# EAGLE board Bad USB PCB (EAGLE 9.7.0)
REV: D
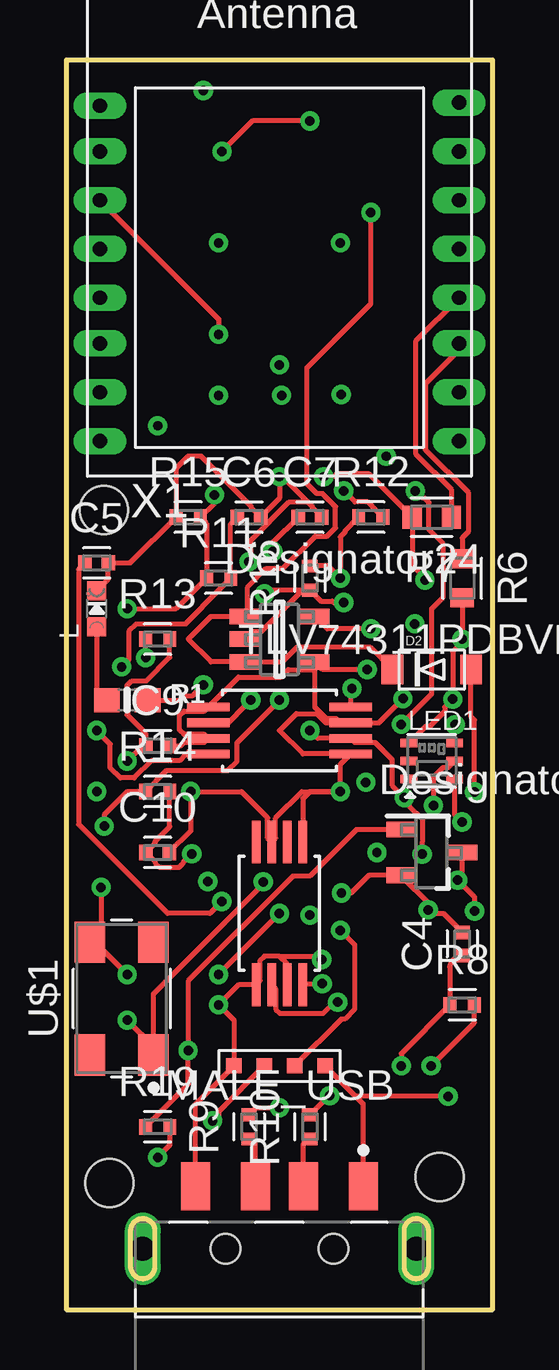
[diagram p0: board, top side]
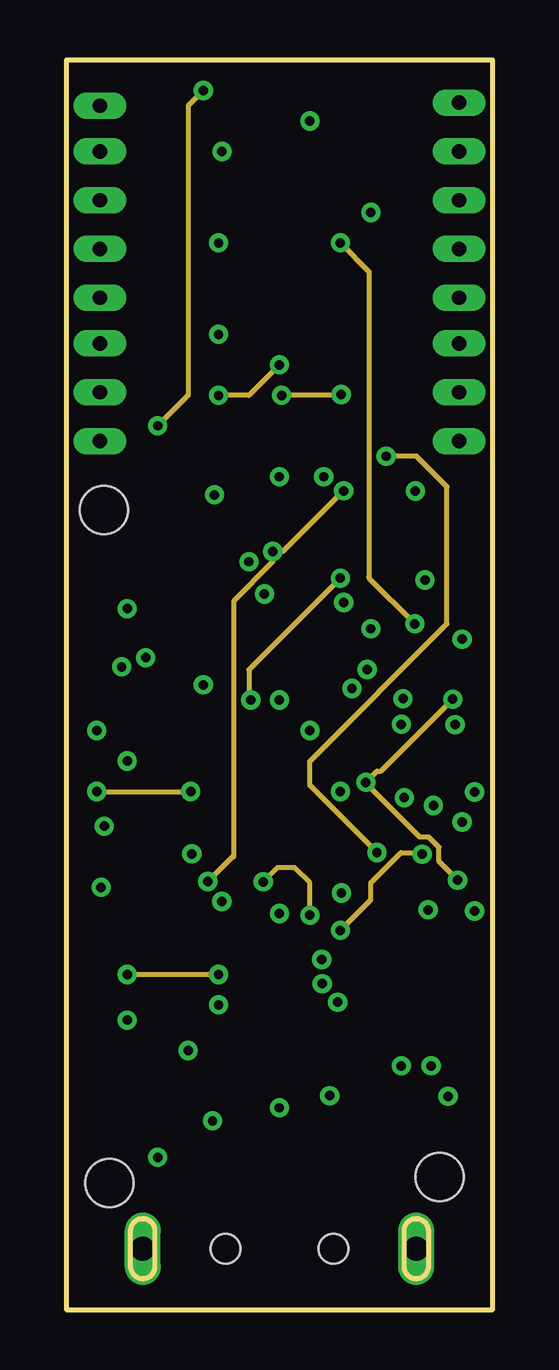
[diagram p1: board, inner layer Route6]
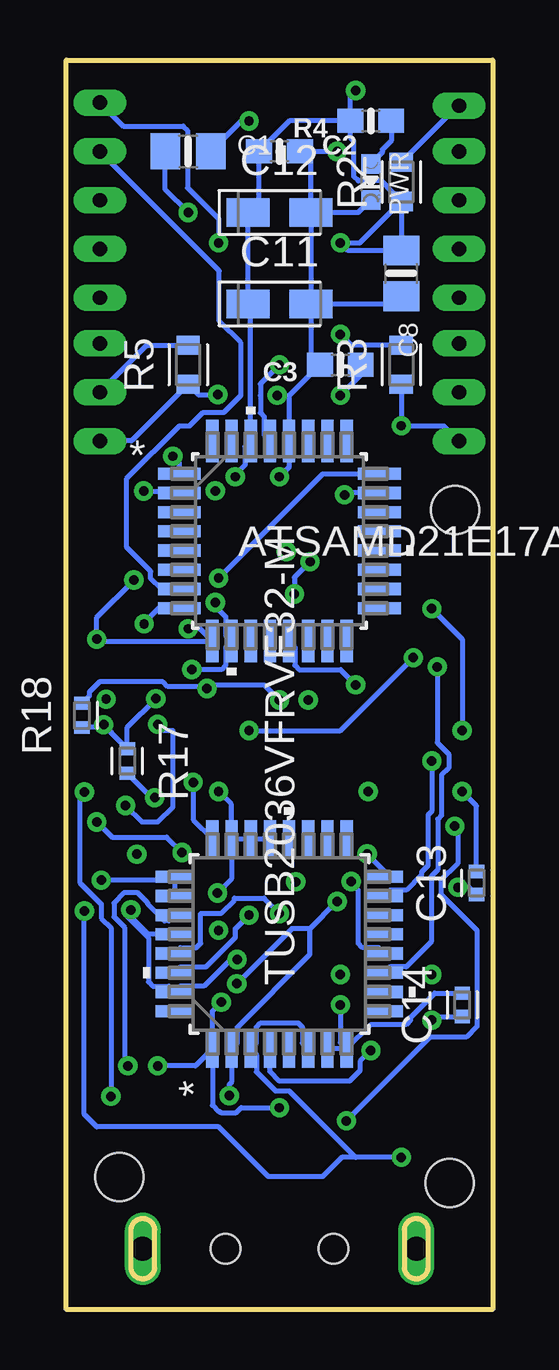
[diagram p2: board, bottom side, seen from below]

Size 17.78 x 52.07 mm. Coordinates in mm from the lower left corner, seen from the top.
Outline: 14.1,3.39 14.11,3.44 14.12,3.48 14.14,3.52 14.16,3.56 14.19,3.59 14.21,3.63 14.25,3.66 14.28,3.69 14.32,3.71 14.35,3.73 14.39,3.75 14.43,3.77 14.48,3.78 14.52,3.79 14.56,3.79 14.61,3.79 14.65,3.79 14.69,3.78 14.74,3.77 14.78,3.76 14.82,3.74 14.86,3.72 14.89,3.69 14.93,3.67 14.96,3.63 14.99,3.6 15.01,3.56 15.03,3.53 15.05,3.49 15.07,3.45 15.08,3.41 15.09,3.36 15.09,3.35 15.09,1.73 15.08,1.69 15.07,1.64 15.06,1.6 15.04,1.56 15.02,1.52 14.99,1.49 14.96,1.45 14.93,1.42 14.9,1.39 14.87,1.37 14.83,1.35 14.79,1.33 14.75,1.31 14.71,1.3 14.66,1.29 14.62,1.29 14.57,1.29 14.53,1.29 14.49,1.3 14.44,1.31 14.4,1.32 14.36,1.34 14.32,1.36 14.29,1.39 14.25,1.42 14.22,1.45 14.19,1.48 14.17,1.52 14.15,1.55 14.13,1.59 14.11,1.63 14.1,1.67 14.09,1.72 14.09,1.73 14.09,3.35 14.1,3.39
Outline: 2.7,3.39 2.71,3.44 2.72,3.48 2.74,3.52 2.76,3.56 2.79,3.59 2.82,3.63 2.85,3.66 2.88,3.69 2.91,3.71 2.95,3.73 2.99,3.75 3.03,3.77 3.08,3.78 3.12,3.79 3.16,3.79 3.21,3.79 3.25,3.79 3.29,3.78 3.34,3.77 3.38,3.76 3.42,3.74 3.46,3.72 3.49,3.69 3.53,3.67 3.56,3.63 3.59,3.6 3.61,3.56 3.63,3.53 3.65,3.49 3.67,3.45 3.68,3.41 3.69,3.36 3.69,3.35 3.69,1.73 3.68,1.69 3.67,1.64 3.66,1.6 3.64,1.56 3.62,1.52 3.59,1.49 3.57,1.45 3.53,1.42 3.5,1.39 3.46,1.37 3.43,1.35 3.39,1.33 3.35,1.31 3.31,1.3 3.26,1.29 3.22,1.29 3.17,1.29 3.13,1.29 3.09,1.3 3.04,1.31 3,1.32 2.96,1.34 2.92,1.36 2.89,1.39 2.85,1.42 2.82,1.45 2.79,1.48 2.77,1.52 2.75,1.55 2.73,1.59 2.71,1.63 2.7,1.67 2.69,1.72 2.69,1.73 2.69,3.35 2.7,3.39
Outline: 0,52.07 0,0 17.78,0 17.78,52.07 0,52.07
Copper layers (1*16): Top 0.035mm / dielectric 1.5mm / Bottom 0.035mm
Design rules "adafruit *": minimum track width 8mil, minimum drill 15.5mil, track to track 8mil, track to pad 8mil, pad to pad 8mil, via to via 8mil, smd to smd 8mil, copper to edge 10mil, drill to drill 8mil, minimum pad ring 10mil, minimum via ring 8mil, stop-mask expansion 2mil, vias tented up to drill 20mil, thermal gap 10mil
Net classes: 1 power: width 0.305 mm
Holes 2 mm at 15.56,5.53 1.8,5.28 1.56,33.32

## Footprints (pad centres in the part's own frame; a part is rotated, then mirrored left to right if it is on the bottom)
0805-NO = smd 1.24 x 1.5: 1 -0.95,0; 2 0.95,0
0603-NO = smd 1.075 x 1: 1 -0.85,0; 2 0.85,0
CAPC1005X60 = smd 0.56 x 0.629: 1 -0.485,0; 2 0.485,0
CAPMP3216X180N = smd 1.796 x 1.189: 1 -1.31,0; 2 1.31,0
SOD-123FL = smd 0.91 x 1.22: A 1.637,0; C -1.637,0
CHIPLED_0603_NOOUTLINE = smd 0.8 x 0.8: A 0,-0.75; C 0,0.75
APA102_2020 = smd 0.7 x 0.35: 1 -0.95,-0.75; 2 -0.95,0; 3 -0.95,0.75; 4 0.95,0.75; 5 0.95,0; 6 0.95,-0.75
0480371000 = smd 1.2 x 2: 1 3.5,2.6; 2 1,2.6; 3 -1,2.6; 4 -3.5,2.6 | drill 1 long: SH1 -5.7,0; SH2 5.7,0 | hole 1.25: -2.25,0; 2.25,0
RESC1608X60 = smd 0.799 x 0.974: 1 -0.815,0; 2 0.815,0
RESC1005X40 = smd 0.535 x 0.644: 1 -0.507,0; 2 0.507,0
DBV0005A_M = smd 1.2 x 0.65: 1 -1.475,0.95; 2 -1.475,0; 3 -1.475,-0.95; 4 1.475,-0.95; 5 1.475,0.95
VF32-M = smd 1.562 x 0.508: 1 -4.375,2.8; 2 -4.375,2; 3 -4.375,1.2; 4 -4.375,0.4; 5 -4.375,-0.4; 6 -4.375,-1.2; 7 -4.375,-2; 8 -4.375,-2.8; 17 4.375,-2.8; 18 4.375,-2; 19 4.375,-1.2; 20 4.375,-0.4; 21 4.375,0.4; 22 4.375,1.2; 23 4.375,2; 24 4.375,2.8 | smd 0.508 x 1.562: 9 -2.8,-4.375; 10 -2,-4.375; 11 -1.2,-4.375; 12 -0.4,-4.375; 13 0.4,-4.375; 14 1.2,-4.375; 15 2,-4.375; 16 2.8,-4.375; 25 2.8,4.375; 26 2,4.375; 27 1.2,4.375; 28 0.4,4.375; 29 -0.4,4.375; 30 -1.2,4.375; 31 -2,4.375; 32 -2.8,4.375
PW8-M = smd 1.778 x 0.356: 1 -2.972,0.975; 2 -2.972,0.325; 3 -2.972,-0.325; 4 -2.972,-0.975; 5 2.972,-0.975; 6 2.972,-0.325; 7 2.972,0.325; 8 2.972,0.975
DBZ0003A_M = smd 1.2 x 0.65: 1 -1.3,0.95; 2 -1.3,-0.95; 3 1.3,0
TQFP32_MC_MCH-M = smd 1.778 x 0.508: 1 -4.17,2.8; 2 -4.17,2; 3 -4.17,1.2; 4 -4.17,0.4; 5 -4.17,-0.4; 6 -4.17,-1.2; 7 -4.17,-2; 8 -4.17,-2.8; 17 4.17,-2.8; 18 4.17,-2; 19 4.17,-1.2; 20 4.17,-0.4; 21 4.17,0.4; 22 4.17,1.2; 23 4.17,2; 24 4.17,2.8 | smd 0.508 x 1.778: 9 -2.8,-4.17; 10 -2,-4.17; 11 -1.2,-4.17; 12 -0.4,-4.17; 13 0.4,-4.17; 14 1.2,-4.17; 15 2,-4.17; 16 2.8,-4.17; 25 2.8,4.17; 26 2,4.17; 27 1.2,4.17; 28 0.4,4.17; 29 -0.4,4.17; 30 -1.2,4.17; 31 -2,4.17; 32 -2.8,4.17
H10S-6.000-20-3050-TR__PACKAGE = smd 1.724 x 1.274: 1 -2.346,-1.321; 2 2.346,-1.321; 3 2.346,1.321; 4 -2.346,1.321
USBFLASHBREAKOUT = smd 0.635 x 0.635: 1 -1.905,0; 2 -0.635,0; 3 0.635,0; 4 1.905,0
ESP-12THROUGH-HOLE = drill 0.6 long: 1 -7.493,4.445; 2 -7.493,2.54; 3 -7.493,0.508; 4 -7.493,-1.524; 5 -7.493,-3.556; 6 -7.493,-5.461; 7 -7.493,-7.493; 8 -7.493,-9.525; 9 7.493,4.572; 10 7.493,2.54; 11 7.493,0.508; 12 7.493,-1.524; 13 7.493,-3.556; 14 7.493,-5.461; 15 7.493,-7.493; 16 7.493,-9.525

## Placement (x,y rotation side)
C1  10uF  [0805-NO]  12.7,48.26 0 bottom
C2  1uF  [0603-NO]  8.89,48.26 0 bottom
C3  1uF  [0603-NO]  6.35,39.37 180 bottom
C4  22 pF  [CAPC1005X60]  16.51,15.24 90 top
C5  22 pF  [CAPC1005X60]  1.27,31.11 0 top
C6  22 pF  [CAPC1005X60]  7.62,33.02 0 top
C7  22 pF  [CAPC1005X60]  10.16,33.02 0 top
C8  10uF  [0805-NO]  3.81,43.18 270 bottom
C9  22 pF  [CAPC1005X60]  3.81,23.5 0 top
C10  22 pF  [CAPC1005X60]  3.81,19.05 0 top
C11  [CAPMP3216X180N]  8.89,41.91 0 bottom
C12  [CAPMP3216X180N]  8.89,45.72 0 bottom
C13  [CAPC1005X60]  0.67,17.78 90 bottom
C14  [CAPC1005X60]  1.27,12.7 90 bottom
D2  SCHOTTKY  [SOD-123FL]  15.24,26.67 0 top
L  red  [CHIPLED_0603_NOOUTLINE]  1.27,29.21 0 top
LED1  AP102-2020  [APA102_2020]  15.24,22.86 0 top
MALE_USB  0480371000  [0480371000]  8.89,2.54 0 top
PWR  green  [CHIPLED_0603_NOOUTLINE]  5.08,46.99 180 bottom
R1  1.5K  [0603-NO]  2.54,25.4 0 top
R2  [RESC1608X60]  3.81,46.99 90 bottom
R3  [RESC1608X60]  3.81,39.37 90 bottom
R4  10K  [0603-NO]  5.08,49.53 180 bottom
R5  [RESC1608X60]  12.7,39.37 90 bottom
R6  [RESC1608X60]  16.51,30.48 270 top
R7  [RESC1608X60]  15.24,33.02 180 top
R8  1.5 kOhm  [RESC1005X40]  16.51,12.7 0 top
R9  27 ohm  [RESC1005X40]  7.62,7.62 90 top
R10  27 ohm  [RESC1005X40]  10.16,7.62 90 top
R11  27 ohm  [RESC1005X40]  6.35,30.48 0 top
R12  27 ohm  [RESC1005X40]  12.7,33.02 0 top
R13  27 ohm  [RESC1005X40]  3.81,27.94 0 top
R14  27 ohm  [RESC1005X40]  3.81,21.59 0 top
R15  15 kOhm  [RESC1005X40]  5.08,33.02 0 top
R16  15 kOhm  [RESC1005X40]  10.16,30.48 90 top
R17  15 kOhm  [RESC1005X40]  15.24,22.86 270 bottom
R18  15 kOhm  [RESC1005X40]  17.13,24.77 90 bottom
R19  10 kOhm  [RESC1005X40]  3.81,7.62 0 top
U1  TLV74311PDBVRDBV0005A_M  [DBV0005A_M]  8.89,27.94 0 top
U2  TUSB2036VFRVF32-M  [VF32-M]  8.89,15.24 90 bottom
U3  SN75240PWPW8-M  [PW8-M]  8.89,16.51 90 top
U4  SN75240PWPW8-M  [PW8-M]  8.89,24.13 0 top
U5  TLV853MDBZRDBZ0003A_M  [DBZ0003A_M]  15.24,19.05 0 top
U6  ATSAMD21E17A-AFTQFP32_MC_MCH-M  [TQFP32_MC_MCH-M]  8.89,32.03 0 bottom
U$1  [H10S-6.000-20-3050-TR__PACKAGE]  2.31,12.96 90 top
U$9  USBFLASHBREAKOUT  [USBFLASHBREAKOUT]  8.89,10.16 0 top
X1  [ESP-12THROUGH-HOLE]  8.89,45.72 0 top

## Library data of the parts
C1-C3 C8 L LED1 PWR R1 R4 = microbuilder
C4-C7 C9-C14 = Capacitor; CATEGORY: Capacitor
D2 X1 = adafruit
MALE_USB = Connector_USB; CATEGORY: Connector; CONTACTS: 4; CURRENT_RATING: 1.5A; DESCRIPTION: CONN PLUG USB2.0 TYPEA 4P SMD RA; GENDER: Male; MANUFACTURER: Molex; MOUNT_TYPE: R/A; MPN: 0480371000; OPERATING_TEMP: -20° to +85°C; PART_STATUS: Active; ROHS_COMPLIANT: RoHS Compliant; SERIES: 48037; SUB-CATEGORY: USB; TYPE: USB-A; VOLTAGE_RATING: 150V AC (RMS)
R2 R3 R5-R19 = Resistor; CATEGORY: Resistor; SUB-CATEGORY: Fixed
U1 = vReg; COPYRIGHT: Copyright (C) 2022 Ultra Librarian. All rights reserved.; DIGI-KEY_PART_NUMBER_1: 296-50002-1-ND; DIGI-KEY_PART_NUMBER_2: 296-50002-2-ND; DIGI-KEY_PART_NUMBER_3: 296-50002-6-ND; DIGI-KEY_PART_NUMBER_4: TLV74311PDBVR-ND; MANUFACTURER_PART_NUMBER: TLV74311PDBVR; MFR_NAME: Texas Instruments; REFDES: RefDes; TYPE: TYPE
U2 = usb hub ic; COPYRIGHT: Copyright (C) 2022 Ultra Librarian. All rights reserved.; DIGI-KEY_PART_NUMBER_1: 296-27129-1-ND; DIGI-KEY_PART_NUMBER_2: 296-27129-2-ND; DIGI-KEY_PART_NUMBER_3: 296-27129-6-ND; DIGI-KEY_PART_NUMBER_4: 2156-TUSB2036VFR-ND; MANUFACTURER_PART_NUMBER: TUSB2036VFR; MFR_NAME: Texas Instruments
U3 U4 = TI SN75240; COPYRIGHT: Copyright (C) 2022 Ultra Librarian. All rights reserved.; MANUFACTURER_PART_NUMBER: SN75240PW; MFR_NAME: Texas Instruments
U5 = Reset ic; COPYRIGHT: Copyright (C) 2022 Ultra Librarian. All rights reserved.; MANUFACTURER_PART_NUMBER: TLV853MDBZR; MFR_NAME: Texas Instruments; REFDES: RefDes; TYPE: TYPE
U6 = M0 Cortex FIXED; COPYRIGHT: Copyright (C) 2022 Ultra Librarian. All rights reserved.; MANUFACTURER_PART_NUMBER: ATSAMD21E17A-AF; MFR_NAME: Microchip
U$1 = H10S-6.000-20-3050-TR   Crystal Library
U$9 = USB FLASH

## Nets
+V: C2.1 C8.1 C11.1 C12.1 LED1.3 R2.1 R3.1 R4.2 R6.2 R7.2 R19.2 U1.5 U2.3 U2.6 U2.24 U2.25 U2.26 U5.3 U6.9 U6.30 X1.8
A3: LED1.6 U6.1
D3_A3_PA07_RXD_SCK: U6.8 X1.9
D4_A2_PA06_TXD_MOSI: U6.7 X1.10
GND: C1.2 C2.2 C3.2 C4.2 C5.2 C6.2 C7.2 C8.2 C9.2 C10.2 C11.2 C12.2 C13.2 C14.2 L.C LED1.4 MALE_USB.4 PWR.C R5.1 R15.1 R16.1 R17.1 R18.1 U1.2 U1.4 U2.7 U2.8 U2.21 U2.22 U2.23 U2.28 U2.31 U3.1 U3.3 U3.5 U3.7 U4.1 U4.3 U4.5 U4.7 U5.2 U6.10 U6.28 U$9.1 X1.16
N$3: C3.1 U6.29
N$5: R2.2 X1.1
N$6: PWR.A R4.1
N$7: R3.2 X1.3
N$8: LED1.5 U6.2
N$9: R5.2 X1.15
N$10: R6.1 X1.14
N$11: R7.1 X1.13
N$13: R12.1 R16.2 U4.2 U6.24
N$14: C14.1 U2.30 U$1.1
N$15: C13.1 U2.29 U$1.3
N$16: R8.2 U2.27
N$20: C4.1 R8.1 R9.2 U2.1 U3.2
N$21: C5.1 R10.2 U2.2 U3.4
N$22: C9.1 R13.2 U2.15
N$23: C10.1 R14.2 U2.16
N$24: C6.1 R11.2 U2.11
N$25: C7.1 R12.2 U2.12
N$26: R13.1 R17.2 U4.6 U$9.3
N$31: R14.1 R18.2 U4.8 U$9.2
N$32: R11.1 R15.2 U4.4 U6.23
PA10: R1.2 U6.13
RED_LED-R1_1.5K: L.A R1.1
USB_HUB_RESET: R19.1 U2.4 U5.1
USB_IN_DM: MALE_USB.2 R10.1
USB_IN_DP: MALE_USB.3 R9.1
VBUS: D2.A MALE_USB.1 U$9.4
VOUT: C1.1 D2.C U1.1 U1.3

## Tracks (layer width: path | path; a pad name or v marks a point on that pad's centre or on a via)
+V  (via drill 0.39)
  Top 0.203: U5.3 16.51,19.02 16.51,18.06 16.33,17.89 | R6.2 v16.51,27.94 16.51,27.8 16.12,27.41 v16.12,25.44 15.79,25.11 15.79,24.94 15.14,24.29 14.97,24.29 LED1.3 | v14.96,30.4 14.96,30.45 14.43,30.99 R7.2 12.62,34.82 11.28,34.82 11.16,34.71 v10.74,34.71 | v12.7,28.37 10.88,28.37 U1.5 | R19.2 4.32,6.86 v3.81,6.35 | v16.32,17.9 16.33,17.89 | v17.02,16.61 17.02,17.2 16.33,17.89
  Route6 0.203: v5.71,50.8 5.08,50.16 5.08,38.1 v3.81,36.83 | v16.12,25.44 13.12,22.44 12.96,22.44 v12.49,21.97 12.49,21.94 14.75,19.69 15.13,19.69 15.54,19.27 15.54,18.68 v16.32,17.9
  Bottom 0.203: R4.2 8.47,49.53 C2.1 9.74,46.18 C12.1 C11.1 10.09,41.8 U6.30 10.33,35.96 10.33,35.18 10.74,34.78 v10.74,34.71 | R2.1 C8.1 6.03,44.13 v6.35,44.45 5.54,44.45 R2.1 | v5.71,50.8 5.93,50.59 R4.2 | R3.1 v3.81,36.83 2.03,36.83 X1.8 | U2.26 U2.25 13.41,17.9 v16.32,17.9 | U2.3 9.85,11.11 9.85,11.77 9.67,11.95 8.11,11.95 7.93,11.77 7.93,11.11 U2.6 | U2.3 | v14.96,30.4 16.51,28.85 v16.51,27.94 16.43,27.86 U6.9 12.2,28.37 v12.7,28.37 | v3.81,6.35 5.71,6.35 | 5.71,6.35 6.29,6.35 7.09,5.55 9.36,5.55 11.43,7.62 16.51,7.62 17.02,8.13 v17.02,16.61 | R2.1 4.38,46.74 4.38,46.77 4.64,47.03 5.61,47.03 5.79,47.21 5.79,48.69 5.93,48.84 R4.2 | U2.3 9.85,10.62 9.85,9.91 9.06,9.12 8.48,9.12 5.71,6.35 | v12.49,21.97 12.49,20.42 U2.24
A3  (via drill 0.39)
  Top 0.203: LED1.6 16.19,20.64 v16.51,20.32
  Route6 0.203: v12.95,19.05 10.16,21.84 10.16,22.86 15.88,28.58 15.88,34.29 14.61,35.56 v13.34,35.56
  Bottom 0.203: U6.1 13.06,35.28 v13.34,35.56 | v16.51,20.32 15.88,19.69 13.59,19.69 v12.95,19.05
D3_A3_PA07_RXD_SCK  (via drill 0.39)
  Route6 0.203: v11.43,44.45 12.63,43.25 12.63,30.55 12.63,30.48 v14.54,28.58
  Bottom 0.203: X1.9 15.41,49.31 12.9,49.31 12.73,49.14 12.73,46.74 11.43,45.45 v11.43,44.45 | U6.8 13.93,29.23 14.54,28.62 v14.54,28.58
D4_A2_PA06_TXD_MOSI
  Bottom 0.203: X1.10 11.4,43.28 11.4,41.19 10.5,40.28 10.5,38.1 11.2,37.39 12.07,37.39 12.63,36.83 13.06,36.83 15.26,34.63 15.26,31.77 14.25,30.76 14.25,30.45 13.83,30.03 U6.7
GND  (via drill 0.39)
  Top 0.203: MALE_USB.4 5.39,8.56 U$9.1 6.99,12.06 v6.35,12.7 7.19,13.54 U3.1 8.08,13.71 8.08,14.55 8.26,14.73 8.87,14.73 | L.C 1.75,30.45 C5.2 2.67,31.11 R15.1 4.57,35.05 5.08,35.56 5.62,35.56 7.72,33.46 7.72,33.4 C6.2 8.89,33.81 v8.89,34.71 9.02,34.71 10.08,33.64 | C9.2 4.76,23.5 4.9,23.64 5.75,23.64 U4.3 5.75,23.97 4.9,23.97 4.72,24.15 4.72,24.76 4.9,24.94 5.75,24.94 U4.1 7.17,26.36 8.95,26.36 9.26,26.67 10.37,26.67 | C4.2 15.73,16.51 15.24,16.51 | 15.24,16.51 15.24,16.8 U5.2 12.62,18.1 11.88,17.36 v11.48,17.36 | v11.43,21.59 11.43,22.72 U4.5 9.87,23.16 8.89,24.13 9.6,24.84 10.45,24.84 10.83,24.45 11.43,24.45 | 11.43,24.45 U4.7 13.04,24.45 v14.04,25.46 | 11.43,24.45 11.26,24.62 10.85,24.62 10.37,25.1 10.37,26.67 | 10.37,26.67 U1.4 10.69,26.67 v12.54,26.67 | U3.5 9.87,21.3 10.16,21.59 v11.43,21.59 | v11.43,21.59 9.83,21.59 8.73,20.5 8.73,19.65 U3.7 8.4,19.65 8.4,20.5 7.31,21.59 v5.19,21.59 5.19,19.94 C10.2 | U1.2 7.74,28.26 8.14,28.26 9.85,29.97 R16.1 | R16.1 10.61,29.52 11.09,29.52 11.14,29.47 v11.57,29.47 | 15.24,16.51 v15.09,16.66 | 10.08,33.64 10.26,33.46 10.26,33.4 C7.2 | 10.08,33.64 9.27,33.64 7.68,32.05 7.68,31.23 v7.62,31.16 | v8.27,29.82 8.42,29.97 R16.1 | LED1.4 16.19,24.35 v16.22,24.38 | v10.16,49.53 7.76,49.53 v6.49,48.26 | U3.3 9.21,14.39 8.87,14.73 | 8.87,14.73 10.51,14.73 v10.66,14.59
  Route6 0.203: v8.98,38.1 9.01,38.13 v11.46,38.13 | v1.27,21.59 v5.19,21.59
  Bottom 0.203: C12.2 7.58,47.8 C2.2 v6.49,48.26 | PWR.C 5.6,45.72 C12.2 | C1.2 10.48,49.53 v10.16,49.53 | C8.2 4.13,41.91 C11.2 | C12.2 C11.2 | C11.2 7.58,39.75 C3.2 8.49,38.08 | 8.49,38.08 U6.28 8.49,35.11 v8.89,34.71 | X1.16 15.06,36.2 R5.1 12.28,38.13 v11.46,38.13 | v6.35,12.7 6.35,11.12 U2.8 | U2.8 U2.7 | U2.23 U2.22 U2.21 | 15.88,24 16.13,24.26 R18.1 | 15.24,16.51 14.37,15.64 U2.28 | U2.23 10.89,21.05 v11.43,21.59 | 8.49,38.08 8.96,38.08 v8.98,38.1 | v11.57,29.47 11.57,29.31 11.13,28.87 11.13,28.1 U6.10 11.13,27.62 11.13,26.84 11.31,26.67 12.07,26.67 12.08,26.67 v12.54,26.67 | 15.24,16.51 v15.09,16.66 | 15.24,16.51 15.24,16.39 14.35,15.5 14.35,13.66 14.17,13.48 13.51,13.48 U2.31 13.02,13.48 12.04,13.48 10.94,14.59 v10.66,14.59 | 15.88,24 R17.1 15.24,24.26 v14.04,25.46 | v7.62,31.16 8.27,30.52 v8.27,29.82 | v16.22,24.38 15.88,24.03 15.88,24 | v11.48,17.36 10.89,17.95 U2.23 | U2.8 5.07,11.88 3.61,11.88 3.43,12.06 3.43,12.17 2.42,13.19 C14.2 | C13.2 0.67,20.99 v1.27,21.59
N$3  (via drill 0.39)
  Route6 0.203: v8.89,39.37 7.62,38.1 v6.35,38.1
  Bottom 0.203: v6.35,38.1 5.5,38.95 C3.1 | U6.29 9.53,36.44 9.53,37.21 9.68,37.37 9.68,38.1 9.68,38.58 v8.89,39.37
N$5
  Bottom 0.203: X1.1 1.45,50.16 R2.2
N$6
  Bottom 0.203: PWR.A 4.6,48.22 4.6,48.33 4.23,48.7 R4.1
N$7  (via drill 0.39)
  Top 0.203: X1.3 6.35,41.28 v6.35,40.64
  Bottom 0.203: v6.35,40.64 5.9,40.19 R3.2
N$8  (via drill 0.39)
  Top 0.203: LED1.5 15.92,22.59 15.71,22.59 15.31,22.19 v15.31,21 | v13.97,24.39 15.24,25.66 15.24,29.21 15.72,29.69 15.72,31.91 15.13,32.5 15.13,33.63 14.95,33.81 14.85,33.81 v14.55,34.11
  Bottom 0.203: v14.55,34.11 13.14,34.11 U6.2 | v15.31,21 14.63,20.32 13.97,20.32 13.34,20.95 13.34,24.13 13.71,24.13 v13.97,24.39
N$9
  Bottom 0.203: R5.2 14.43,40.19 X1.15
N$10
  Top 0.203: X1.14 16.38,40 14.97,38.58 14.97,35.84 16.76,34.05 16.76,32.41 16.51,32.16 R6.1
N$11
  Top 0.203: R7.1 16.05,34.18 14.56,35.67 14.56,40.34 X1.13
N$13  (via drill 0.39)
  Top 0.203: R16.2 10.92,30.99 v11.43,30.48 11.43,32.2 11.64,32.41 11.64,32.46 R12.1 | U4.2 6.77,24.45 7.11,24.8 7.11,24.82 v7.69,25.4
  Route6 0.203: v11.43,30.48 7.62,26.67 7.62,25.4
  Bottom 0.203: v11.43,30.48 7.08,34.83 U6.24
N$14  (via drill 0.39)
  Top 0.203: v8.21,17.82 8.21,17.74 3.64,13.16 U$1.1 3.64,10.97 v2.54,12.06
  Route6 0.203: v8.21,17.82 8.8,18.42 9.53,18.42 10.16,17.78 v10.16,16.44
  Bottom 0.203: U2.30 13.02,14.28 11.96,14.28 10.73,15.51 10.73,15.88 v10.16,16.44 | C14.1 2.39,12.22 v2.54,12.06
N$15  (via drill 0.39)
  Top 0.203: v8.89,16.51 v6.35,13.97 | v2.54,13.97 1.2,15.31 U$1.3 1.45,15.77 v1.45,17.6
  Route6 0.203: v2.54,13.97 v6.35,13.97
  Bottom 0.203: U2.29 13.02,15.08 12.36,15.08 12.18,15.26 12.18,16.51 11.33,16.51 10.77,17.07 10.77,17.14 9.53,17.14 v8.89,16.51 | C13.1 0.97,17.6 v1.45,17.6
N$16  (via drill 0.39)
  Top 0.203: R8.2 17.02,11.96 v15.21,10.16
  Bottom 0.203: U2.27 13.51,16.2 13.69,16.2 14.38,16.89 14.38,16.95 14.8,17.37 15.38,17.37 15.79,16.95 15.79,16.37 15.35,15.93 15.35,10.3 v15.21,10.16
N$20  (via drill 0.39)
  Top 0.203: C4.1 arc90 16,14.25 R8.1 13.97,10.67 v13.97,10.16 | U3.2 8.73,13.37 8.73,12.52 8.91,12.34 10.71,12.34 11.18,12.81 v11.32,12.81 | R9.2 7.91,8.41 v8.89,8.41
  Bottom 0.203: U2.1 12.39,10.16 v13.97,10.16 | U2.1 11.69,12.44 v11.32,12.81 | U2.1 11.69,8.52 11.43,8.25 11.38,8.25 11.33,8.21 10.69,8.21 10.49,8.41 v8.89,8.41
N$21  (via drill 0.39)
  Top 0.203: v6.49,17.01 5.99,16.51 4.22,16.51 0.51,20.22 0.51,30.84 C5.1 | U3.4 9.91,13.58 v10.67,13.58 | R10.2 10.95,8.92 v10.99,8.92
  Bottom 0.203: 7.62,15.88 7.62,14.8 10.65,11.77 10.65,11.11 U2.2 10.89,9.47 10.99,9.37 v10.99,8.92 | 7.62,15.88 v6.49,17.01 | 7.62,15.88 8.37,15.88 10.36,13.88 10.38,13.88 v10.67,13.58
N$22  (via drill 0.39)
  Top 0.203: v2.54,22.86 3.18,23.5 C9.1 3.33,24 2.55,24.77 2.55,25.39 2.53,25.4 | R13.2 4.32,27.18 3.35,26.2 2.73,26.2 2.53,26.01 2.53,25.4 | 2.53,25.4 2.53,24.77
  Bottom 0.203: U2.15 4.27,17.48 3.61,17.48 2.97,18.12 2.97,18.23 2.69,18.5 2.69,20.61 2.54,20.76 v2.54,22.86
N$23  (via drill 0.39)
  Top 0.203: R14.2 4.32,20.13 3.71,19.53 3.71,19.43 C10.1 3.71,18.67 3.71,18.61 3.89,18.43 4.7,18.43 4.88,18.61 4.88,18.64 v5.23,18.99
  Bottom 0.203: v5.23,18.99 4.52,18.27 U2.16
N$24  (via drill 0.39)
  Top 0.203: C6.1 6.86,32.74 R11.2 6.42,30.04 6.42,30.03 4.95,28.57 2.91,28.57 2.61,28.27 2.61,27.08 v2.31,26.78
  Bottom 0.203: U2.11 4.27,14.28 3.61,14.28 2.56,15.33 2.56,18.06 2.29,18.34 2.29,20.44 2.13,20.59 2.13,22.27 1.84,22.57 1.84,23.15 2.31,23.62 v2.31,26.78
N$25  (via drill 0.39)
  Top 0.203: C7.1 8.61,31.95 v8.61,31.59 | R12.2 12.77,33.46 12.77,33.47 12.58,33.66 12.03,33.66 v11.57,34.12
  Route6 0.203: v11.57,34.12 9.04,31.59 v8.61,31.59 8.61,31.16 6.99,29.53 6.99,18.87 6.93,18.87 v5.9,17.84
  Bottom 0.203: U2.12 4.76,15.08 5.42,15.08 5.6,15.26 5.6,17.48 5.9,17.78 v5.9,17.84
N$26  (via drill 0.39)
  Top 0.203: v10.16,24.13 10.49,23.81 U4.6 12.03,23.64 12.88,23.64 13.59,22.93 13.59,21.86 14.11,21.33 | R13.1 v3.3,27.18 v3.31,27.17 | 14.11,21.33 14.29,21.33 14.29,21 14.85,20.45 14.85,19.47 14.84,19.46 v14.84,18.98 | U$9.3 11.47,12.11 11.61,12.11 12.02,12.52 12.02,15.21 v11.43,15.81 | 14.11,21.33 v14.1,21.33
  Route6 0.203: v11.43,15.81 12.7,17.08 12.7,17.78 13.96,19.04 14.78,19.04 v14.84,18.98
  Bottom 0.203: v10.16,24.13 6.35,24.13 v3.31,27.17 | R17.2 14.22,21.33 v14.1,21.33
N$31  (via drill 0.39)
  Top 0.203: U4.8 11.86,25.83 v11.91,25.88 | v8.89,25.4 7.11,23.62 7.11,22.85 6.73,22.47 4.18,22.47 3.75,22.04 3.75,22.03 R14.1 2.54,21.59 1.58,20.63 v1.58,20.15 | U$9.2 6.35,8.25 6.35,8.12 v6.1,7.87
  Bottom 0.203: v8.89,25.4 9.53,26.03 12.07,26.03 | R18.2 16.82,25.58 16.82,25.73 16.39,26.16 13.75,26.16 13.55,25.97 12.25,25.97 12.18,26.03 12.07,26.03 | v11.91,25.88 12.07,26.03 | v1.58,20.15 1.46,20.03 1.46,18.59 2.16,17.89 2.16,17.31 0.65,15.8 0.65,11.81 1.1,11.36 2.61,11.36 v6.1,7.87
N$32  (via drill 0.39)
  Top 0.203: U4.4 5,23.16 4.72,22.88 3.55,22.88 2.83,22.16 2.25,22.16 1.84,22.57 1.84,23.56 v1.27,24.13 | v2.54,29.21 4.57,29.21 R11.1 5.84,32.77 R15.2 6.18,33.61 v6.18,33.95
  Bottom 0.203: v1.27,24.13 1.27,27.94 v2.54,29.21 | v6.18,33.95 6.1,34.03 U6.23
PA10  (via drill 0.39)
  Top 0.203: v5.71,26.03 5.27,25.59 4.9,25.59 4.71,25.4 R1.2
  Bottom 0.203: v5.71,26.03 6.35,26.67 8.07,26.67 8.25,26.84 8.25,27.62 U6.13
RED_LED-R1_1.5K
  Top 0.203: R1.1 1.27,25.82 L.A
USB_HUB_RESET  (via drill 0.39)
  Top 0.203: R19.1 3.75,8.06 3.75,8.07 5.08,9.4 v5.08,10.8 5.08,13.7 9.45,18.07 10.16,18.07 12.09,20 U5.1 13.97,19.97
  Bottom 0.203: v5.08,10.8 5.53,10.34 5.53,9.96 5.96,9.53 8.89,9.53 9.29,9.92 U2.4
USB_IN_DM
  Top 0.203: MALE_USB.2 9.89,6.9 10.11,7.11 R10.1
USB_IN_DP
  Top 0.203: MALE_USB.3 7.89,6.9 7.67,7.11 R9.1
VBUS  (via drill 0.39)
  Top 0.203: MALE_USB.1 12.39,8.56 U$9.4 12.07,8.89 v15.92,8.89 | D2.A 16.88,24.71 17.02,24.56 v17.02,21.57
  Bottom 0.203: v15.92,8.89 15.92,15.92 16.32,16.32 16.32,16.9 17.21,17.8 17.21,21.38 v17.02,21.57
VOUT  (via drill 0.39)
  Top 0.203: D2.C 12.65,27.62 9.64,27.62 9.01,26.99 U1.3 6.03,26.99 5.08,27.94 6.03,28.89 U1.1 7.56,29.03 7.56,30.11 8.34,30.89 9.04,30.89 10.38,32.23 10.88,32.23 11.23,32.58 11.23,33.46 10.69,34 10.44,34 10.03,34.41 10.03,39.24 12.7,41.91 v12.7,45.72
  Bottom 0.203: v12.7,45.72 13.65,46.67 C1.1

## Text on the board
tDocu: D0/A4/SDA | D4/A2/RXD/MOSI | D1/A0/VOUT | D3/A3/TXD/SCK | D2/A1/SCL/MISO